# Altium PCB board.PcbDoc
Units mm, origin at the board's own origin, x right, y up, seen from the top; angles counter-clockwise.
Board outline 33.5 x 15 mm, 2 copper layers (Top Layer, Bottom Layer), stack 0.97 mm thick; 52 components, 33 nets, 155 pads, 41 vias.
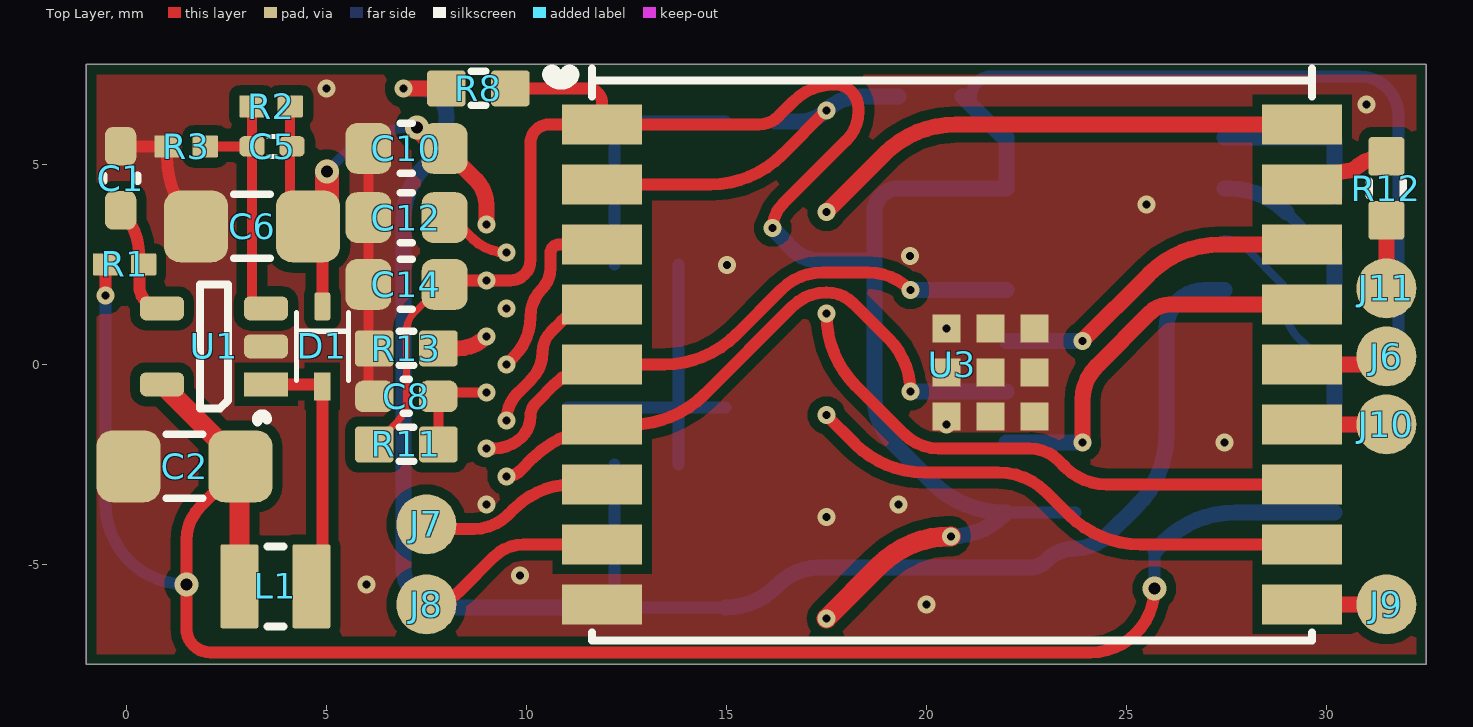
[diagram p0: Top Layer view]
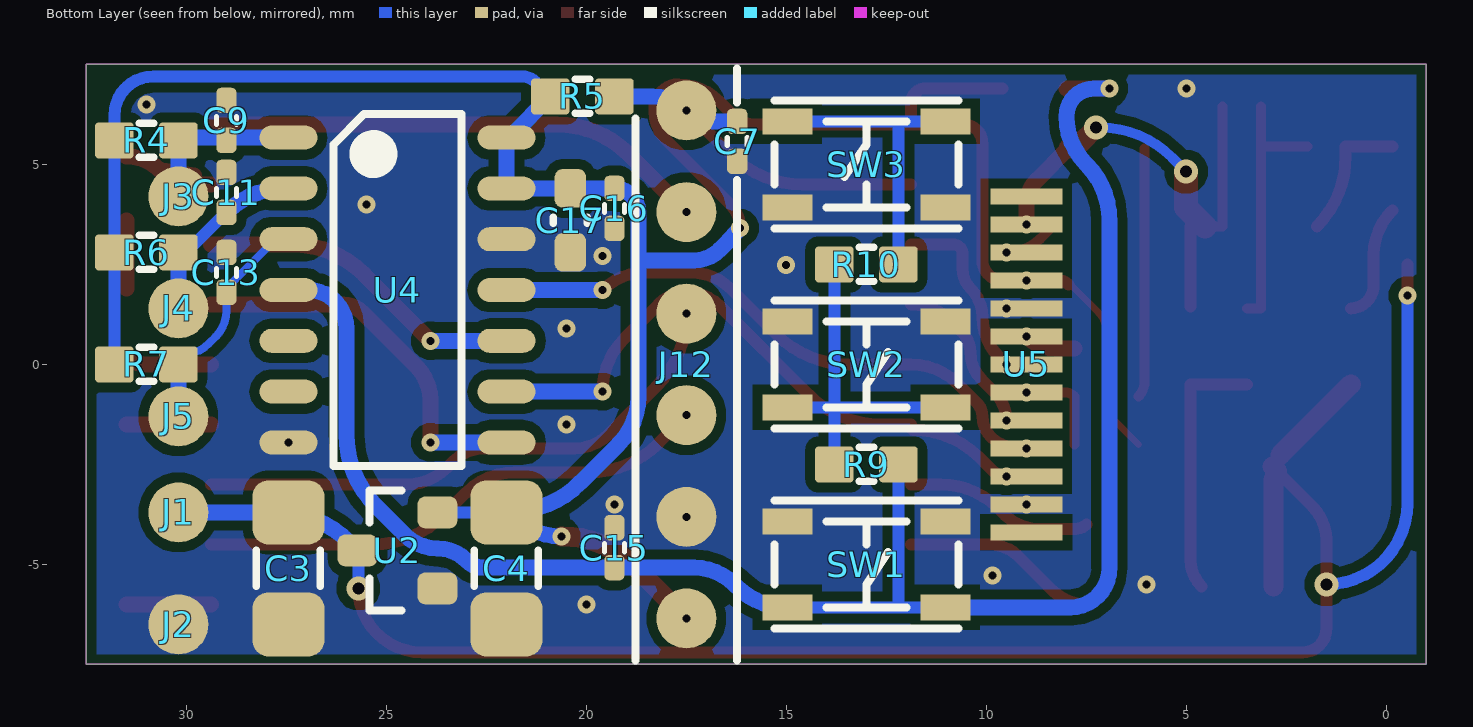
[diagram p1: Bottom Layer view, seen from below]
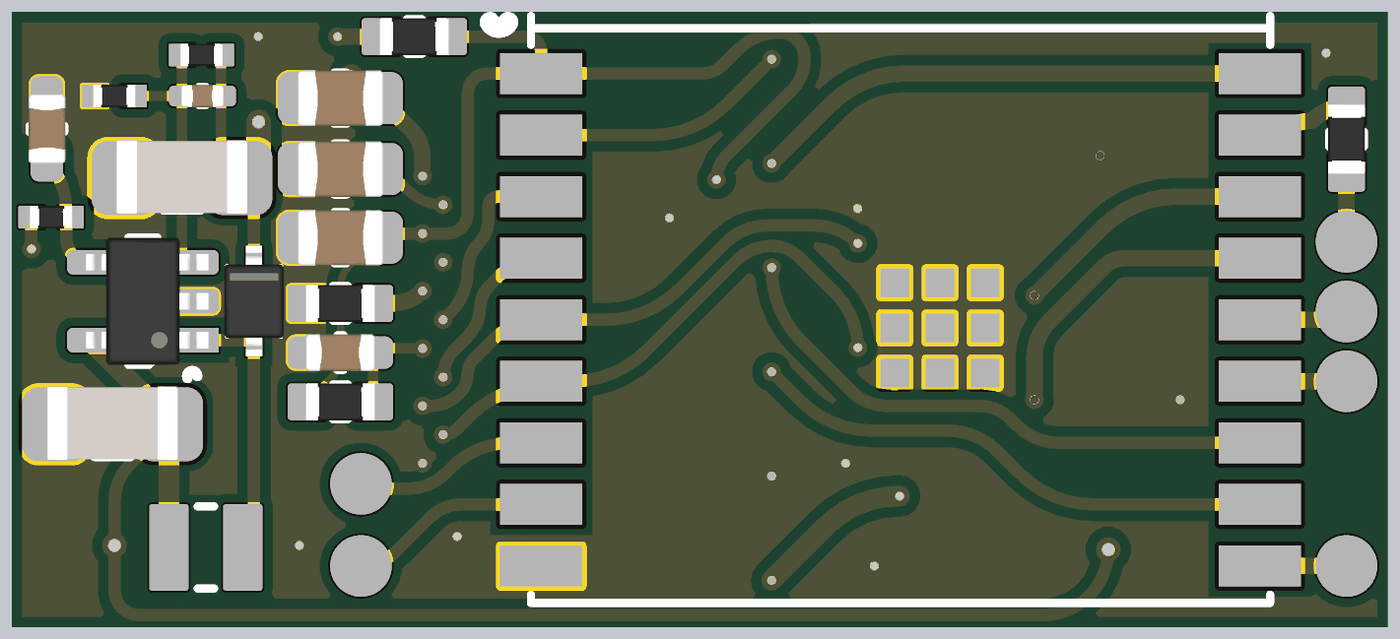
[diagram p2: 3D render of the assembled board from above, using the file's embedded part models]
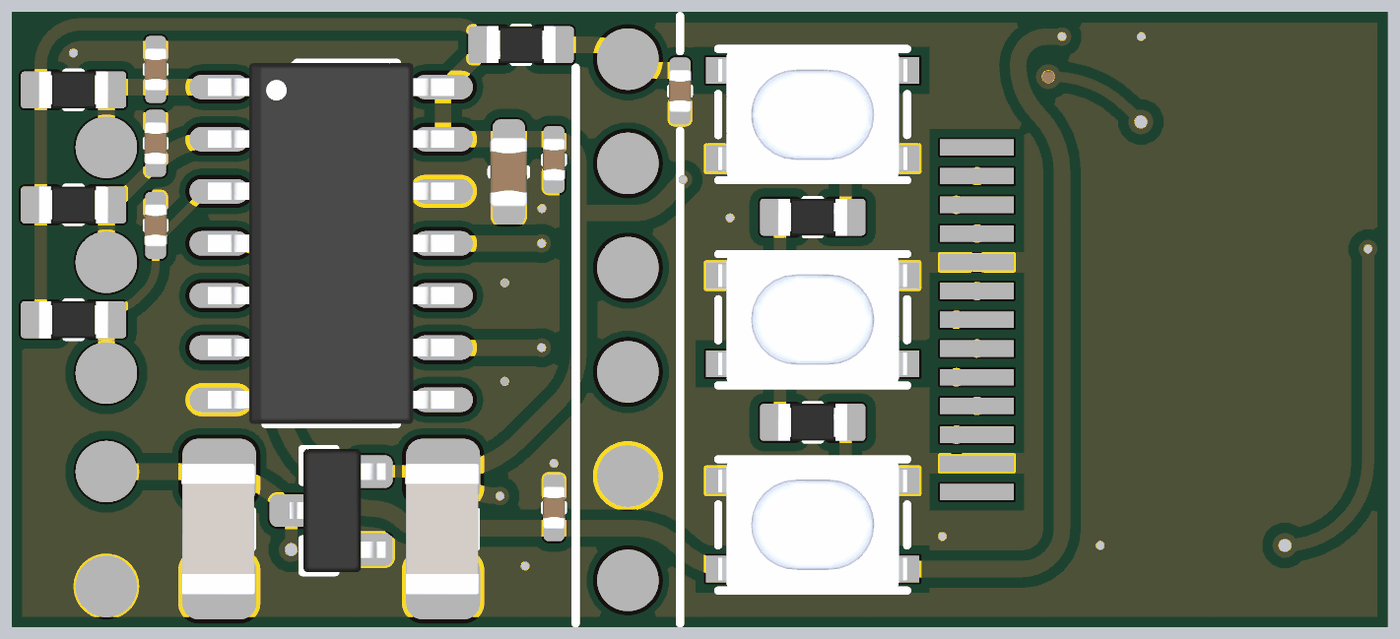
[diagram p3: 3D render of the assembled board from below, using the file's embedded part models]

## Layer stack, top to bottom
Top Solder: solder mask 0.0127, Solder Resist, Dk 3.8
Top Layer: signal copper 0.035
Dielectric: core 0.9, FR-4, Dk 4.5
Bottom Layer: signal copper 0.035
Bottom Solder: solder mask 0.0127, Solder Resist, Dk 3.8

## Board outline
-1,-7.5 -1,7.5 32.5,7.5 32.5,-7.5

## Design rules (kind name [scope] priority, off if disabled: settings)
AcuteAngle [All] p1: minimum=6.00000000000000E+0001 checktracksonly=FALSE
Clearance Clearance_1 [All] p1: gap=0.25 ignorepadtopadclearanceinfootprint=FALSE except(0.13: Arc-Arc Arc-Track Arc-SMDPad Arc-Via Track-Track Track-SMDPad Track-Via SMDPad-SMDPad SMDPad-Via THPad-Via Via-Via; 0.15: Arc-THPad Arc-Text Arc-Hole Track-THPad Track-Text Track-Hole SMDPad-THPad SMDPad-Text SMDPad-Hole THPad-THPad THPad-Text THPad-Hole Via-Text Via-Hole Fill-Text Fill-Hole Poly-Text Poly-Hole Region-Text Region-Hole Text-Text Text-Hole)
ComponentClearance ComponentClearance_2 [HasFootprint('TP30_SMD')] p1: gap=-1 collisioncheckmode=3 verticalgap=2540 showdistances=FALSE
ComponentClearance ComponentClearance_1 [HasFootprint('HDR-1X6')] p2: gap=-1 collisioncheckmode=3 verticalgap=2540 showdistances=FALSE
ComponentClearance [All] p3: gap=0.3 collisioncheckmode=3 verticalgap=0.254 showdistances=FALSE
HoleSize [All] p1: absolutevalues=TRUE maxlimit=6 minlimit=0.2 maxpercent=80.000 minpercent=20.000
HoleToHoleClearance HoleToHoleClearance_1 [IsVia vs IsThruPin] p1: gap=0.7 allowstackedmicrovias=TRUE
HoleToHoleClearance [All] p2: gap=0.5 allowstackedmicrovias=TRUE
MinimumSolderMaskSliver [All] p1 off: minsoldermaskwidth=0.254
PlaneClearance [All] p1: clearance=0.45
PlaneConnect [All] p1: planeconnectstyle=Direct reliefexpansion=0.3 reliefentries=4 reliefconductorwidth=0.381 reliefairgap=0.178
PolygonConnect [All] p1: connectstyle=Direct reliefconductorwidth=0.381 reliefentries=4 polygonreliefangle="90 Angle" airgapwidth=0.356
RoutingVias [All] p1: holewidth=0.3 width=0.6 viastyle="Through Hole" minholewidth=0.2 minwidth=0.45 maxholewidth=0.9 maxwidth=1.27
SilkToSilkClearance [All] p1 off: silktosilkclearance=0.254
SilkToSolderMaskClearance [IsPad] p1 off: minsilkscreentomaskgap=0.254 clearancetoexposedcopper=TRUE
SolderMaskExpansion [All] p1: expansion=0.102 istentingtop=FALSE
UnRoutedNet [All] p1: checkbadconnections=TRUE
Width [All] p1: maxlimit=3.81 minlimit=0.14 preferedwidth=0.254
21 further rules are at their usual default settings.

## Components (designator, comment, footprint, x,y, rotation, side; value= is the part's Value field where it differs from the comment)
C1 "1uF" C0603 -0.147,4.652 r270 top
C2 "10uF" C1206 1.453,-2.548 r0 top
C3 "10uF" C1206 27.45,-5.1 r90 bottom
C4 "10uF" C1206 22,-5.1 r90 bottom
C5 "220pF" C0402 3.64,5.452 r0 top
C6 "10uF" C1206 3.14,3.452 r0 top
C7 "100nF" C0402 16.23,5.575 r90 bottom
C8 "1uF" C0603 7,-0.8 r0 top
C9 "100nF" C0402 29,6.1 r270 bottom
C10 "4.7uF" C0805 7,5.4 r0 top
C11 "100nF" C0402 29,4.3 r270 bottom
C12 "4.7uF" C0805 7,3.671 r0 top
C13 "100nF" C0402 29,2.3 r270 bottom
C14 "4.7uF" C0805 7,2 r0 top
C15 "100nF" C0402 19.3,-4.58 r270 bottom
C16 "100nF" C0402 19.3,3.9 r90 bottom
C17 "1uF" C0603 20.4,3.6 r90 bottom
D1 "1N4148WS" SOD-323 4.897,0.452 r270 top
J1 "undef" TP30_SMD#1 30.2,-3.7 r90 bottom
J2 "undef" TP30_SMD#1 30.2,-6.5 r90 bottom
J3 "undef" TP30_SMD#1 30.2,4.2 r270 bottom
J4 "undef" TP30_SMD#1 30.2,1.4 r270 bottom
J5 "undef" TP30_SMD#1 30.2,-1.3 r270 bottom
J6 "undef" TP30_SMD#1 31.5,0.2 r0 top
J7 "undef" TP30_SMD#2 7.5,-3.7 r0 top
J8 "undef" TP30_SMD#2 7.5,-5.7 r0 top
J9 "undef" TP30_SMD#1 31.5,-6 r0 top
J10 "undef" TP30_SMD#1 31.5,-1.5 r0 top
J11 "undef" TP30_SMD#3 31.5,3.3 r0 top
J12 "" HDR-1X6 17.5,0 r0 bottom
L1 "10UH" L2520 3.724,-5.548 r0 top
R1 "10k" R0402 -0.047,2.5 r0 top
R2 "18k" R0402 3.616,6.452 r180 top
R3 "2k 1%" R0402 1.494,5.452 r180 top
R4 "10k" R0603 31,5.6 r0 bottom
R5 "4k7" R0603 20.1,6.7 r0 bottom
R6 "10k" R0603 31,2.8 r0 bottom
R7 "10k" R0603 31,0 r0 bottom
R8 "undef" R0603 8.8,6.9 r180 top
R9 "undef" R0603 13,-2.5 r0 bottom
R10 "undef" R0603 13,2.5 r180 bottom
R11 "4k7" R0603 7,-2 r180 top
R12 "" R0603 31.5,4.4 r90 top
R13 "510k" R0603 7,0.4 r180 top
SW1 "PTS810SJS250" BTN_PTS810 13,-5 r180 bottom
SW2 "PTS810SJS250" BTN_PTS810 13,0 r180 bottom
SW3 "PTS810SJS250" BTN_PTS810 13,5 r0 bottom
U1 "LM27313" SOT-23-5 2.19,0.452 r0 top
U2 "XC6206P332MR" SOT-23 24.725,-4.65 r180 bottom
U3 "ESP32-C3-WROOM-02-N4(4MB)" ESP32-C3-WROOM-02-N4-4MB 20.64,0 r0 top
U4 "MCP3004-I/SL" SOIC-14 24.725,1.86 r270 bottom
U5 "REX064128AWPP3N0Y0" REX064128AWPP3N0Y0 9,0 r180 bottom

## Footprints (in the part's own frame and the unit in brackets; to place one, negate y for a bottom-side part, rotate by r counter-clockwise, add the part's x,y. Pads: shape width x height; smd on the part's side, far side on the other; paste and mask are expansions set on the pad)
BTN_PTS810 [mm]
  rect 1.25x0.65 smd mask+0.05: 1(-1.975,1.075) 2(1.975,1.075) 3(-1.975,-1.075) 4(1.975,-1.075)
  silkscreen extent -2.3,-1.6 2.3,1.6, body extent -2.3,-1.6 2.3,1.6, height 2.5
C0402 [mm] "Chip Capacitor Body"
  rrect50% 0.635x0.508 smd mask+0.05: 1(-0.5,0) 2(0.5,0)
  silkscreen extent -0.1,-0.25 0.1,0.25, body extent -0.52,-0.27 0.53,0.28, height 0.55
C0603 [mil] "Chip Capacitor"
  rrect50% 38x31 smd mask+1.97: 1(-31.5,0) 2(31.5,0)
  silkscreen extent -3,-17 3,17, body extent -33,-18 33,18, height 35
C0805 [mil] "Chip Capacitor"
  rrect50% 45x50 smd mask+1.97: 1(-37.5,0) 2(37.5,0)
  silkscreen extent -6,-25 6,25, body extent -41,-27 41,27, height 53
C1206 [mm] "Chip Capacitor"
  rrect50% 1.6x1.8 smd: 1(-1.4,0) 2(1.4,0)
  silkscreen extent -0.45,-0.8 0.45,0.8, body extent -1.6,-0.88 1.6,0.92, height 1.6
ESP32-C3-WROOM-02-N4-4MB [mm]
  rect 2x1 smd: 1(-8.75,6) 2(-8.75,4.5) 3(-8.75,3) 4(-8.75,1.5) 5(-8.75,0) 6(-8.75,-1.5) 7(-8.75,-3) 8(-8.75,-4.5) 9(-8.75,-6) 10(8.75,-6) 11(8.75,-4.5) 12(8.75,-3) 13(8.75,-1.5) 14(8.75,0) 15(8.75,1.5) 16(8.75,3) 17(8.75,4.5) 18(8.75,6)
  rect 0.7x0.7 smd: 19(-0.14,-1.3) 19(-0.14,-0.2) 19(-0.14,0.9) 19(0.96,-1.3) 19(0.96,-0.2) 19(0.96,0.9) 19(2.06,-1.3) 19(2.06,-0.2) 19(2.06,0.9)
  silkscreen extent -10,-6.9 9,7.4, body extent -9,-6.9 9,13.1, height 3
HDR-1X6 [mm]
  round 1.5 smd: 1(0,6.35) 2(0,3.81) 3(0,1.27) 4(0,-1.27) 5(0,-3.81) 6(0,-6.35)
  silkscreen extent -1.27,-7.4 1.27,7.4
L2520 [mm] "Chip Inductor"
  rrect10% 0.95x2.1 smd mask+0.05: 1(-0.9,0) 2(0.9,0)
  silkscreen extent -0.2,-1 0.2,1, body extent -1.26,-1 1.24,1, height 0.9
R0402 [mm]
  rrect10% 0.635x0.55 smd mask+0.05: 1(-0.476,0) 2(0.476,0)
  body extent -0.52,-0.27 0.53,0.28, height 0.4
R0603 [mil] "Chip Resistor; Body 1.6 x 0.8 mm (LxW typ)"
  rrect20% 38x35.43 smd mask+1.97: 1(-31.5,0) 2(31.5,0)
  silkscreen extent -7,-17 7,17, body extent -33,-18 33,18, height 22
REX064128AWPP3N0Y0 [mm]
  rect 1.8x0.4 smd mask+0.05: 1(0,4.2) 2(0,3.5) 3(0,2.8) 4(0,2.1) 5(0,1.4) 6(0,0.7) 7(0,0) 8(0,-0.7) 9(0,-1.4) 10(0,-2.1) 11(0,-2.8) 12(0,-3.5) 13(0,-4.2)
  body extent -0.9,-7 43.8,7, height 1.26
SOD-323 [mm]
  rect 0.701x0.403 smd mask+0.05: 1(1,0)
  rrect30% 0.703x0.401 smd mask+0.05: 2(-1,0)
  silkscreen extent -0.85,-0.65 0.85,0.65, body extent -1.35,-0.72 1.35,0.72, height 1.1
SOIC-14 [mm]
  oval 0.6x1.45 smd: 1(-3.81,-2.725) 2(-2.54,-2.725) 3(-1.27,-2.725) 4(0,-2.725) 5(1.27,-2.725) 6(2.54,-2.725) 7(3.81,-2.725) 8(3.81,2.725) 9(2.54,2.725) 10(1.27,2.725) 11(0,2.725) 12(-1.27,2.725) 13(-2.54,2.725) 14(-3.81,2.725)
  silkscreen extent -4.4,-1.6 4.4,1.6, body extent -4.4,-3 4.4,3, height 1.75
SOT-23 [mm]
  rrect50% 1x0.8 smd mask+0.05: 1(1,-0.95) 2(1,0.95) 3(-1,0)
  silkscreen extent -0.7,-1.5 0.1,1.5, body extent -1.27,-1.5 1.33,1.5, height 1.1
SOT-23-5 [mm]
  rect 1.1x0.6 smd mask+0.05: 1(1.3,-0.95)
  rrect50% 1.1x0.6 smd mask+0.05: 2(1.3,0) 3(1.3,0.95) 4(-1.3,0.95) 5(-1.3,-0.95)
  silkscreen extent -0.35,-1.87 1.33,1.55, body extent -1.6,-1.55 1.6,1.55, height 1.45
TP30_SMD#1 [mm] "TP30_SMD"
  round 1.5 smd mask+0.05: 1(0,0)
TP30_SMD#2 [mm] "TP30_SMD"
  round 1.5 smd mask+0.05: 1(0,-0.3)
TP30_SMD#3 [mm] "TP30_SMD"
  round 1.5 smd mask+0.05: 1(0,-1.4)

## Part data
C1 C8 C17: library part CAP, "1uF 0603"
C2 C6: library part CAP, "10uf 25V 1206"
C3 C4: library part CAP, "10uf 50V 1206"
C5: library part CAP, "220pF 0402"
C7 C9 C11 C13 C15 C16: library part CAP, "100nF 0402"
C10 C12 C14: library part CAP, "4.7uF 50V 0805"
D1: library part US1M-13-F
J1 J2 J3 J4 J5 J6 J7 J8 J9 J10 J11: library part TP_Dup1
J12: library part "Header 3_1"
L1: library part SRN3015-100M, "VLS252012HBX-100M-1"
R1: library part RES, "10k 0402"
R2: library part RES, "18k 0402"
R3: library part RES, "2k 0402"
R4 R6 R7: library part RES, "10k 0603"
R5 R11: library part RES, "4k7 0603"
R8 R9 R10 R12: library part RES
R13: library part RES, "510k 0603"
SW1 SW2 SW3: library part Component_1
U1: library part LM27313XMFX, "LM27313XMFX/NOPB"
U2: library part Component_4_1
U5: library part "Header 3"

## Via types
v1: diameter 0.45, hole 0.2, Top Layer to Bottom Layer, tented both sides, 37 vias
v2: diameter 0.6, hole 0.3, Top Layer to Bottom Layer, tented both sides, 4 vias

## Nets (pads, with @x,y where several pads share a name; then routed paths per layer and width w, separated by ;. In a path a pad name is that pad's centre, name@x,y a point inside that pad or via, vN(x,y) a via of type N, cw(c..) or ccw(c..) an arc to the next point about the centre after c; other vN are vias at no path point)
3V3: C4.2 C14.2 C16.2 C17.2 J12.1 R4.2 R5.2 R6.2 R7.2 R8.1 R11.2 U2.2 U3.1 U4.13 U4.14 U5.4 | length 69.7
  Top Layer w0.18: R11.2 6.788,-1.412 ccw(c6.276,-0.9) 7,-0.9 7,0.817 cw(c7.683,0.817) 7.2,1.3 7.863,1.963 cw(c7.952,1.873) C14.2
  Top Layer w0.3: C14.2 cw(c8.194,1.759) 8.194,2.1 v1(9,2.1) 9.6,2.1 ccw(c9.6,2.6) 10.1,2.6 10.1,5.529 cw(c10.571,5.529) 10.571,6 U3.1 ; R8.1 11.52,6.9 cw(c11.52,6.53) 11.89,6.53 U3.1 ; v1(16.158,3.415) cw(c16.985,3.415) 16.4,4 18,5.6 ccw(c17.276,6.324) 18.3,6.324 18.3,6.4 ccw(c17.7,6.4) 17.7,7 ccw(c17.7,5.551) 16.676,6.576 16.3,6.2 cw(c15.817,6.683) 15.817,6 U3.1
  Top Layer w0.5: v1(17.5,-6.35) 18.81,-5.04 cw(c20.606,-6.837) 20.606,-4.297 v1(20.617,-4.297)
  Bottom Layer w0.3: R5.2 21.118,6.7 cw(c21.618,6.7) 21.618,7.2 30.827,7.2 cw(c30.827,6.227) 31.8,6.227 R4.2 R6.2 R7.2 ; U4.14@21.881,5.719 ccw(c22,5.839) U4.14 ; C4.2 U2.2
  Bottom Layer w0.4: v1(16.158,3.415) 16.527,3.008 16.667,2.868 ccw(c17.314,3.514) 17.314,2.6 18.7,2.6 ; v1(20.617,-4.297) ccw(c20.617,-2.398) 21.96,-3.74 C4.2 ; R5.2 U4.14@21.881,5.719 ; C4.2@21.952,-3.7 cw(c21.952,-1.16) 20.156,-2.956 19.195,-1.995 cw(c20.39,-0.8) 18.7,-0.8 18.7,2.6 ; U4.14 U4.13 C17.2 C16.2 ccw(c19.3,3.8) 18.7,3.8 18.7,2.6
5V: C2.2 C3.2 J1.1 L1.1 R1.1 U1.5 U2.3 | length 50.3
  Top Layer w0.3: R1.1 v1(-0.523,1.723) ccw(c-0.5,1.723) v1@-0.5,1.7 ; C2.2@2.74,-2.66 1.853,-3.548 ccw(c2.706,-4.4) 1.5,-4.4 v2(1.5,-5.5) 1.5,-6.6 ccw(c2.1,-6.6) 2.1,-7.2 24.1,-7.2 ccw(c24.1,-5.6) v2(25.7,-5.6)
  Top Layer w0.5: U1.5 C2.2@2.653,-2.26 ; L1.1 2.824,-2.961 ccw(c2.24,-2.961) 2.74,-2.66 C2.2
  Bottom Layer w0.3: v1(-0.523,1.723) -0.523,-3.477 ccw(c1.5,-3.477) v2(1.5,-5.5) ; v2(25.7,-5.6) 25.7,-4.675 cw(c25.725,-4.675) U2.3
  Bottom Layer w0.4: U2.3 25.931,-4.444 cw(c27.727,-6.24) 27.727,-3.7 J1.1
9V: C5.2 C6.2 C10.2 D1.2 R2.1 U5.2 | length 13.2
  Top Layer w0.25: R2.1 4.092,3.452 C6.2
  Top Layer w0.3: C6.2 4.897,3.452 D1.2
  Top Layer w0.4: C10.2 8.73,4.622 cw(c8.079,3.971) 9,3.971 v1(9,3.5)
  Top Layer w0.5: v2(7.262,5.924) 7.669,5.518 ccw(c7.952,5.801) C10.2
  Top Layer w0.6: C6.2 5.008,3.92 v2(5.008,4.82)
  Bottom Layer w0.25: v2(5.008,4.82) 5.368,5.18 cw(c7.164,3.384) 7.164,5.924 v2(7.262,5.924)
CS_ADC: U3.15 U4.8 | length 9.6
  Top Layer w0.4: v1(23.9,-1.95) 23.9,-0.904 cw(c25.117,-0.904) 24.256,-0.044 25.6,1.3 cw(c26.083,0.817) 26.083,1.5 U3.15
  Bottom Layer w0.4: U4.8 v1(23.9,-1.95)
CS_D: U3.3 U5.7 | length 4.5
  Top Layer w0.3: v1(9.5,0) 9.681,0.181 ccw(c8.669,1.193) 10.1,1.193 cw(c11.083,1.193) 10.388,1.888 ccw(c9.876,2.4) 10.6,2.4 10.6,2.771 cw(c10.829,2.771) 10.829,3 U3.3
DC: U3.4 U5.9 | length 4.1
  Top Layer w0.3: v1(9.5,-1.4) cw(c10.466,-1.4) 9.783,-0.717 10.117,-0.383 ccw(c9.434,0.3) 10.4,0.3 cw(c11.124,0.3) 10.612,0.812 10.883,1.083 cw(c11.89,0.076) U3.4
EN: C7.2 J12.6 R5.1 U3.2 | length 9.5
  Top Layer w0.3: U3.2 14.598,4.5 ccw(c14.598,7.04) 16.394,5.244 v1(17.5,6.35)
  Bottom Layer w0.4: C7.2 16.836,6.075 ccw(c16.836,7.014) v1(17.5,6.35) cw(c18.345,5.505) 18.345,6.7 R5.1
GND: C1.1 C2.1 C3.1 C4.1 C6.1 C7.1 C8.1 C9.1 C10.1 C11.1 C12.1 C13.1 C14.1 C15.1 C16.1 C17.1 J2.1 J12.2 R3.2 R13.2 SW1.1 SW1.2 SW2.1 SW2.2 SW3.1 SW3.2 U1.2 U2.1 U3.9 U3.19 U4.7 U4.12 U5.5 U5.12 | length 9.6
  Top Layer w0.25: C10.1 C12.1 C14.1 6.047,-0.432 ccw(c6.568,-0.432) C8.1
  Top Layer w0.3: C1.1 R3.2 1.018,5.197 ccw(c3.485,5.197) C6.1
  other v1: 20,-6 6,-5.5 9.843,-5.28 17.5,-3.81 9,-3.5 19.3,-3.5 27.45,-1.95 20.5,-1.5 20.5,0.9 9.5,1.4 15.011,2.482 19.593,2.71 25.5,4 31,6.5 5,6.9
GPIO0: J12.5 U3.18 | length 12.7
  Top Layer w0.4: v1(17.5,3.81) 18.946,5.256 cw(c20.742,3.46) 20.742,6 U3.18
L0: J6.1 U3.14 | length 2.2
  Top Layer w0.4: U3.14 31.017,0 ccw(c31.017,0.683) J6.1
L1: J7.1 U3.7 | length 4.7
  Top Layer w0.3: J7.1 ccw(c7.771,-3.729) 7.771,-4.112 8.684,-4.112 ccw(c8.684,-2.896) 9.544,-3.756 9.7,-3.6 cw(c11.149,-5.049) 11.149,-3 U3.7
L2: J8.1 U3.8 | length 4.9
  Top Layer w0.3: J8.1 ccw(c7.5,-4.793) 8.353,-5.647 9.2,-4.8 cw(c9.924,-5.524) 9.924,-4.5 U3.8
L3: J9.1 U3.10 | length 2.1
  Top Layer w0.4: U3.10 J9.1
L4: J10.1 U3.13 | length 2.1
  Top Layer w0.4: U3.13 J10.1
MISO: U3.16 U4.10 | length 8.3
  Top Layer w0.4: v1(23.9,0.59) 25.566,2.256 cw(c27.362,0.46) 27.362,3 U3.16
  Bottom Layer w0.4: U4.10 v1(23.9,0.59)
MOSI: U3.6 U4.9 U5.11 | length 15.5
  Top Layer w0.3: v1(9.5,-2.8) ccw(c9.5,-2.317) 9.841,-2.659 10.175,-2.325 cw(c11.833,-3.983) 11.833,-1.639 U3.6 12.648,-1.5 ccw(c12.648,1.04) 14.444,-0.756 16.646,1.446 cw(c17.5,0.593) 17.5,1.8 cw(c17.5,0.834) 18.183,1.517 19.048,0.652 cw(c17.717,-0.68) v1(19.6,-0.68)
  Bottom Layer w0.4: v1(19.6,-0.68) U4.9
NetC1_2: C1.2 R1.2 U1.4 | length 2.9
  Top Layer w0.3: C1.2 cw(c-1.278,2.721) 0.321,2.721 0.321,1.971 ccw(c0.89,1.971) U1.4
NetC5_1: C5.1 R2.2 R3.1 U1.3 | length 6.6
  Top Layer w0.25: R3.1 C5.1 ; R2.2 C5.1 ; U1.3 3.14,1.402 C5.1
NetC8_2: C8.2 R11.1 U5.8 | length 2.4
  Top Layer w0.25: R11.1 C8.2 cw(c8.041,-1.041) 8.041,-0.7 v1(9,-0.7)
NetC9_2: C9.2 J3.1 R4.1 U4.1 | length 4.2
  Bottom Layer w0.4: U4.1 30.031,5.67 cw(c30.031,5.431) R4.1 J3.1
NetC11_2: C11.2 J4.1 R6.1 U4.2 | length 4.7
  Bottom Layer w0.3: C11.2 30,2.8 R6.1
  Bottom Layer w0.4: U4.2 27.551,4.4 cw(c27.551,2.351) C11.2 ; J4.1 R6.1
NetC12_2: C12.2 U5.3 | length 1.4
  Top Layer w0.25: C12.2@8.3,3.5 8.65,3.15 ccw(c9.495,3.995) 9.495,2.8 v1(9.5,2.8)
NetC13_2: C13.2 J5.1 R7.1 U4.3 | length 5.6
  Bottom Layer w0.2: U4.3 cw(c27.45,2.357) 27.996,2.904 28.929,1.971 cw(c28.759,1.8) C13.2 29,1.34 ccw(c29.914,1.34) 29.268,0.693 29.44,0.52 ccw(c30.087,1.167) R7.1@30.087,0.253
  Bottom Layer w0.4: J5.1 R7.1
NetC15_2: C15.2 R8.2 R9.1 SW1.3 SW1.4 U4.4 | length 44
  Top Layer w0.4: v1(6.929,6.9) R8.2
  Bottom Layer w0.3: SW1.4 12.2,-6.075 ; R9.1 12.2,-6.075 ; SW1.3 12.2,-6.075
  Bottom Layer w0.4: v1(6.929,6.9) 7.307,6.9 cw(c7.307,6.207) 8,6.207 cw(c6.293,6.207) 7.5,5 ccw(c8.878,3.622) 6.929,3.622 6.929,-5.1 ccw(c7.904,-5.1) 7.904,-6.075 SW1.4 ; SW1.3 ccw(c14.975,-4.264) 16.255,-5.545 16.3,-5.5 cw(c17.314,-6.514) 17.314,-5.08 C15.2 22.565,-5.08 ccw(c22.565,-4.465) 23,-4.9 cw(c23.724,-5.624) 23.724,-4.6 ccw(c23.724,-3.451) 24.536,-4.264 ; 24.536,-4.264 25.256,-3.544 ccw(c23.46,-1.748) 26,-1.748 26,0.9 cw(c26.96,0.9) 26.96,1.86 U4.4
NetD1_1: D1.1 L1.2 U1.1 | length 6.5
  Top Layer w0.3: U1.1 4.897,-0.498 D1.1 4.897,-4.888 cw(c3.963,-4.888) L1.2
NetR9_2: R9.2 R10.1 SW2.3 SW2.4 | length 9
  Bottom Layer w0.3: SW2.4 13.8,-1.075 ; R9.2 13.8,-1.075 ; R10.1 13.8,-1.075 ; SW2.3 13.8,-1.075
NetR10_2: R10.2 SW3.3 SW3.4 | length 7.5
  Bottom Layer w0.3: SW3.3 12.2,6.075 ; R10.2 12.2,6.075 ; SW3.4 12.2,6.075
NetR12_2: R12.2 U3.17 | length 2.3
  Top Layer w0.4: U3.17 29.584,4.5 ccw(c29.584,4.729) 29.812,4.729 30.67,4.858 cw(c31.495,4.033) 31.495,5.2 R12.2
NetR13_1: R13.1 U5.6 | length 1.3
  Top Layer w0.4: R13.1 8.276,0.4 ccw(c8.276,1.424) v1(9,0.7)
SCK: U3.5 U4.11 U5.10 | length 14.9
  Top Layer w0.3: v1(9,-2.1) 9.193,-2.1 ccw(c9.193,-1.117) 9.888,-1.812 ccw(c9.376,-1.3) 10.1,-1.3 cw(c10.583,-1.3) 10.241,-0.959 10.712,-0.488 cw(c11.89,-1.665) U3.5 13.448,0 ccw(c13.448,2.54) 15.244,0.744 16.376,1.876 ; 16.376,1.876 cw(c17.4,0.851) 17.4,2.3 18.538,2.3 cw(c18.538,0.798) v1(19.6,1.86)
  Bottom Layer w0.4: v1(19.6,1.86) U4.11
TRIAC_EN: J11.1 R12.1 | length 1.7
  Top Layer w0.4: J11.1 R12.1
U0_RXD: J12.3 U3.11 | length 12.9
  Top Layer w0.3: v1(17.5,-1.27) 18.215,-1.985 ; 18.215,-1.985 ccw(c19.941,-0.259) 19.941,-2.7 21.793,-2.7 cw(c21.793,-4.407) 23,-3.2 23.556,-3.756 ccw(c25.352,-1.96) 25.352,-4.5 U3.11
U0_TXD: J12.4 U3.12 | length 14
  Top Layer w0.3: v1(17.5,1.27) 17.5,1.252 ccw(c20.04,1.252) 18.244,-0.544 19.446,-1.746 ; 19.447,-1.747 ccw(c20.3,-0.893) 20.3,-2.1 22.576,-2.1 cw(c22.576,-3.124) 23.3,-2.4 23.476,-2.576 ccw(c24.5,-1.551) 24.5,-3 U3.12
pads on no net: U4.5 U4.6 U5.1 U5.13

## Polygon pours and split planes (outlines as drawn)
GND on Top Layer "NONET_L02_P-001" (solid, remove dead copper, pour order 1): -2.2,8.1 -2.2,-8.2 33,-8.2 33,8.1
GND on Bottom Layer "NONET_L02_P-001" (solid, remove dead copper, pour order 0): -2.2,8.1 -2.2,-8.2 33,-8.2 33,8.1

## Keep-outs
Keep-Out Layer:
  the board outline again, w0

## Other copper
Top Layer:
  pour cut-out: 2.713,-6.825 4.624,-6.825 4.624,-4.265 2.713,-4.265